# Altium PCB protoboard.PcbDoc
Units mil, origin at the board's own origin, x right, y up, seen from the top; angles counter-clockwise.
Board outline 1150 x 1150 mil, 2 copper layers (Top Layer, Bottom Layer); 9 components, 18 nets, 80 pads, 0 vias.
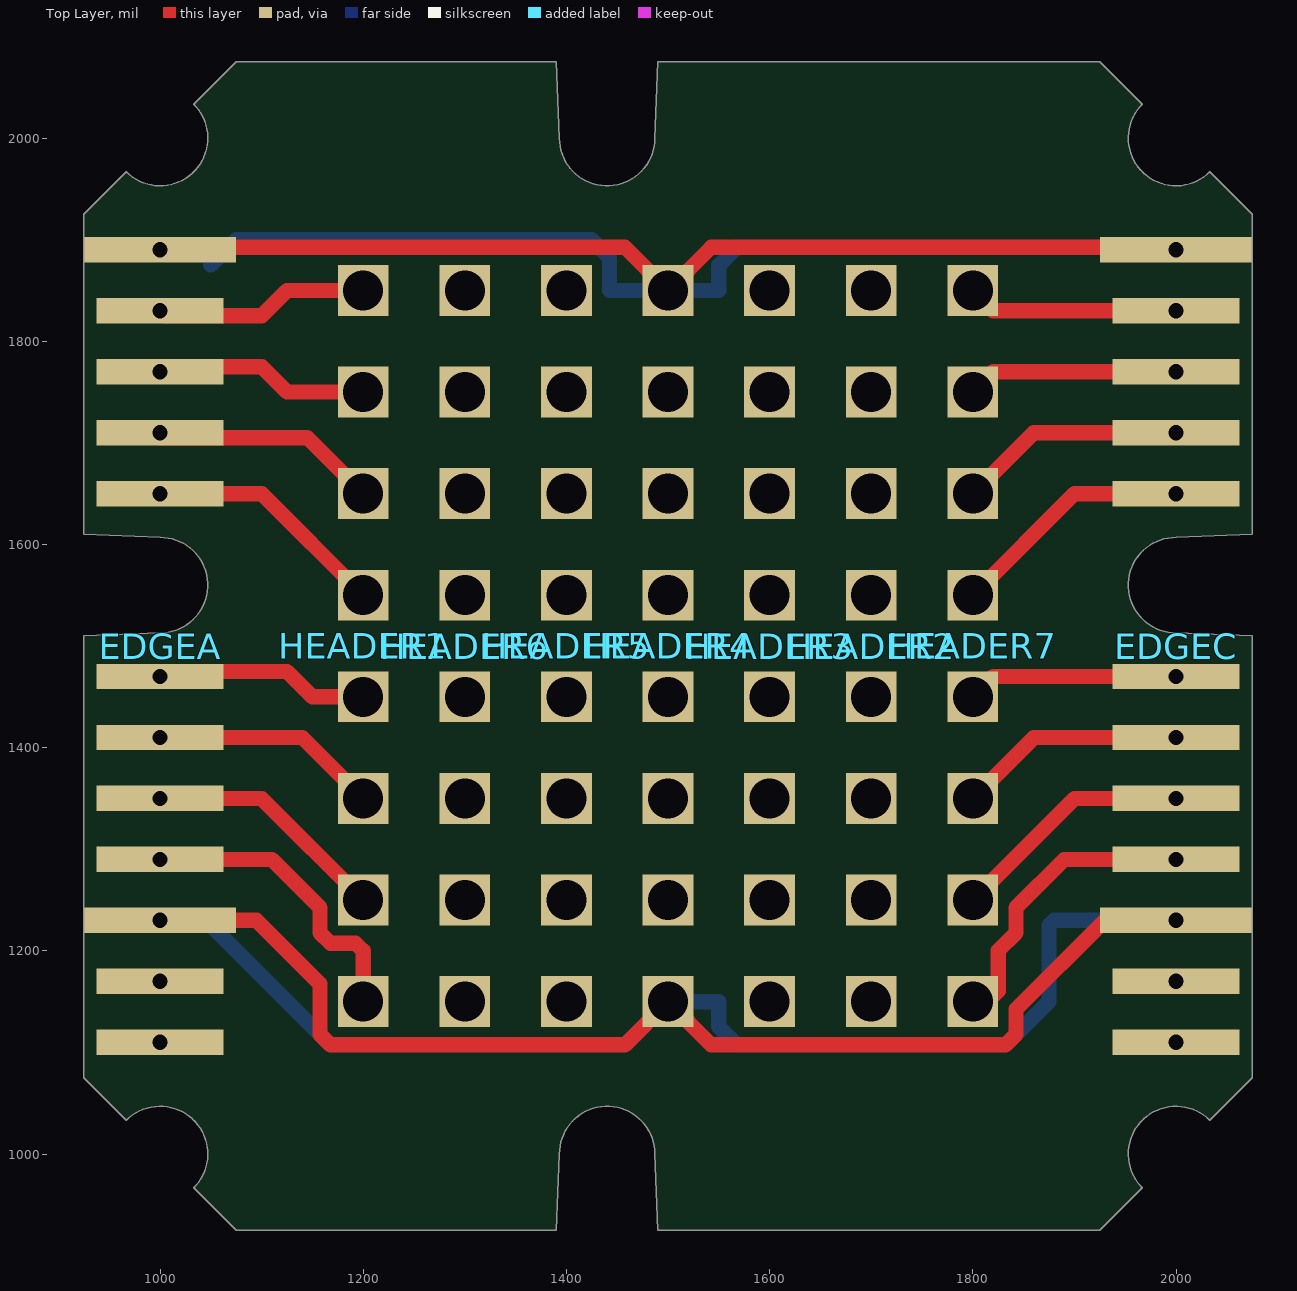
[diagram p0: Top Layer view]
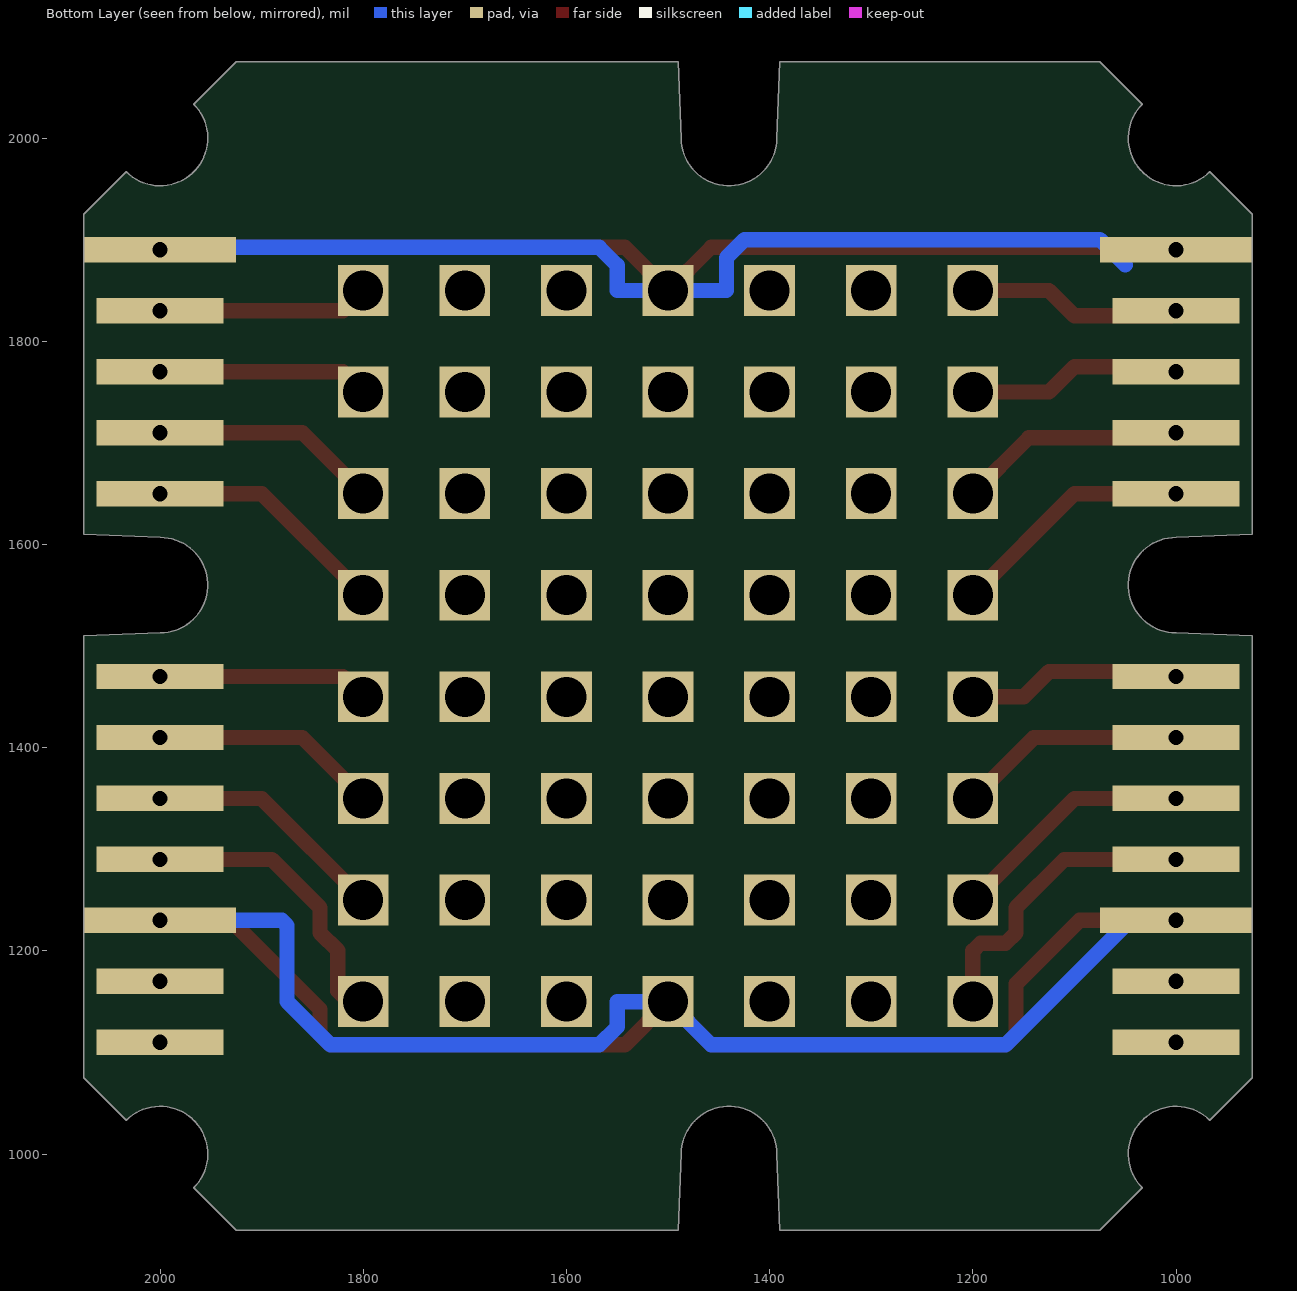
[diagram p1: Bottom Layer view, seen from below]

## Layer stack, top to bottom
Top Solder: solder mask 0.4, Solder Resist, Dk 3.5
Top Layer: signal copper 1.4
Dielectric 1: dielectric 12.6, FR-4, Dk 4.8
Bottom Layer: signal copper 1.4
Bottom Solder: solder mask 0.4, Solder Resist, Dk 3.5

## Board outline
966.77,1033.23 cw(c1000,1000) 1033.23,966.77 1075,925 1390,925 1393,1000 cw(c1440,1000) 1487,1000 1486.97,1000.68 1490,925 1925,925 1966.77,966.77 cw(c2000,1000) 2033.23,1033.23 2075,1075 2075,1510 1999.32,1513.03 2000,1513 cw(c2000,1560) 2000,1607 2075,1610 2075,1925 2033.23,1966.77 cw(c2000,2000) 1966.77,2033.23 1925,2075 1490,2075 1486.97,1999.32 1487,2000 cw(c1440,2000) 1393,2000 1390,2075 1075,2075 1033.23,2033.23 cw(c1000,2000) 966.77,1966.77 925,1925 925,1610 1000,1607 cw(c1000,1560) 1000,1513 1000.68,1513.03 925,1510 925,1075

## Design rules (kind name [scope] priority, off if disabled: settings)
Clearance [All] p1: gap=10
PolygonConnect [All] p1: connectstyle=Relief reliefconductorwidth=10 reliefentries=4 polygonreliefangle="90 Angle" airgapwidth=10
RoutingVias [All] p1: holewidth=28 width=50 viastyle="Through Hole" minholewidth=28 minwidth=50 maxholewidth=28 maxwidth=50
SolderMaskExpansion [All] p1: expansion=4
UnpouredPolygon [All] p1: allowunpoured=FALSE
Width [All] p1: maxlimit=15 minlimit=10 preferedwidth=10
29 further rules are at their usual default settings.

## Components (designator, comment, footprint, x,y, rotation, side; value= is the part's Value field where it differs from the comment)
EDGEA "Generic Modular8 edge" "MODULAR8 VERTICAL PINS" 1000,985 r0 top
EDGEC "Generic Modular8 edge" "MODULAR8 VERTICAL PINS" 2000,985 r0 top
HEADER1 "8x1" "8x1 THRU HOLES 0.1\" PITCH" 1200,1500 r180 top
HEADER2 "8x1" "8x1 THRU HOLES 0.1\" PITCH" 1700,1500 r0 top
HEADER3 "8x1" "8x1 THRU HOLES 0.1\" PITCH" 1600,1500 r0 top
HEADER4 "8x1" "8x1 THRU HOLES 0.1\" PITCH" 1500,1500 r180 top
HEADER5 "8x1" "8x1 THRU HOLES 0.1\" PITCH" 1400,1500 r0 top
HEADER6 "8x1" "8x1 THRU HOLES 0.1\" PITCH" 1300,1500 r0 top
HEADER7 "8x1" "8x1 THRU HOLES 0.1\" PITCH" 1800,1500 r180 top

## Footprints (in the part's own frame and the unit in brackets; to place one, negate y for a bottom-side part, rotate by r counter-clockwise, add the part's x,y. Pads: shape width x height; smd on the part's side, far side on the other; paste and mask are expansions set on the pad)
"8x1 THRU HOLES 0.1\" PITCH" [mm]
  rect 1.27x1.27 hole 1 unplated: 1(0,8.89) 2(0,6.35) 3(0,3.81) 4(0,1.27) 5(0,-1.27) 6(0,-3.81) 7(0,-6.35) 8(0,-8.89)
"MODULAR8 VERTICAL PINS" [mil]
  rect 150x25 hole 15 unplated: 1(0,905) 10(0,245)
  rect 125x25 hole 15 unplated: 2(0,845) 3(0,785) 4(0,725) 5(0,665) 6(0,485) 7(0,425) 8(0,365) 9(0,305) 11(0,185) 12(0,125)

## Nets (pads, with @x,y where several pads share a name; then routed paths per layer and width w, separated by ;. In a path a pad name is that pad's centre, name@x,y a point inside that pad or via, vN(x,y) a via of type N, cw(c..) or ccw(c..) an arc to the next point about the centre after c; other vN are vias at no path point)
NetEDGEA_1: EDGEA.1 EDGEC.1 HEADER4.8 | length 2074.8
  Top Layer w15: EDGEA.1 1000,1892.5 1457.5,1892.5 HEADER4.8 1542.5,1892.5 2000,1892.5 EDGEC.1
  Bottom Layer w15: 1050,1875 1075,1900 1424.75,1900 1442.5,1882.25 1442.5,1850 HEADER4.8 1550,1850 1550,1874.75 1567.75,1892.5 2000,1892.5 EDGEC.1
NetEDGEA_2: EDGEA.2 HEADER1.8 | length 212.4
  Top Layer w15: EDGEA.2 1005,1825 1100,1825 1125,1850 HEADER1.8
NetEDGEA_3: EDGEA.3 HEADER1.7 | length 212.4
  Top Layer w15: EDGEA.3 1005,1775 1100,1775 1125,1750 HEADER1.7
NetEDGEA_4: EDGEA.4 HEADER1.6 | length 227.8
  Top Layer w15: EDGEA.4 1000,1705 1145,1705 HEADER1.6
NetEDGEA_5: EDGEA.5 HEADER1.5 | length 241.4
  Top Layer w15: EDGEA.5 1100,1650 HEADER1.5
NetEDGEA_6: EDGEA.6 HEADER1.4 | length 212.4
  Top Layer w15: EDGEA.6 1005,1475 1125,1475 1150,1450 HEADER1.4
NetEDGEA_7: EDGEA.7 HEADER1.3 | length 224.9
  Top Layer w15: EDGEA.7 1140,1410 HEADER1.3
NetEDGEA_8: EDGEA.8 HEADER1.2 | length 241.4
  Top Layer w15: EDGEA.8 1100,1350 HEADER1.2
NetEDGEA_9: EDGEA.9 HEADER1.1 | length 301.8
  Top Layer w15: EDGEA.9 1110,1290 1157.5,1242.5 1157.5,1217.75 1167.75,1207.5 1192.5,1207.5 1200,1200 HEADER1.1
NetEDGEA_10: EDGEA.10 EDGEC.10 HEADER4.1 | length 2375.3
  Top Layer w15: EDGEA.10 1095,1230 1157.5,1167.5 1157.5,1117.75 1167.75,1107.5 1457.5,1107.5 HEADER4.1 1542.5,1107.5 1832.25,1107.5 1842.5,1117.75 1842.5,1142.5 1930,1230 EDGEC.10
  Bottom Layer w15: EDGEA.10 1045.25,1230 1167.75,1107.5 1457.5,1107.5 HEADER4.1 1550,1150 1550,1125.25 1567.75,1107.5 1832.25,1107.5 1875,1150.25 1875,1225 1880,1230 EDGEC.10
NetEDGEC_2: EDGEC.2 HEADER7.8 | length 208.3
  Top Layer w15: HEADER7.8 1820,1830 EDGEC.2
NetEDGEC_3: EDGEC.3 HEADER7.7 | length 208.3
  Top Layer w15: HEADER7.7 1820,1770 EDGEC.3
NetEDGEC_4: EDGEC.4 HEADER7.6 | length 224.9
  Top Layer w15: HEADER7.6 1860,1710 EDGEC.4
NetEDGEC_5: EDGEC.5 HEADER7.5 | length 241.4
  Top Layer w15: HEADER7.5 1900,1650 EDGEC.5
NetEDGEC_6: EDGEC.6 HEADER7.4 | length 208.3
  Top Layer w15: HEADER7.4 1820,1470 EDGEC.6
NetEDGEC_7: EDGEC.7 HEADER7.3 | length 224.9
  Top Layer w15: HEADER7.3 1860,1410 EDGEC.7
NetEDGEC_8: EDGEC.8 HEADER7.2 | length 241.4
  Top Layer w15: HEADER7.2 1900,1350 EDGEC.8
NetEDGEC_9: EDGEC.9 HEADER7.1 | length 295.9
  Top Layer w15: HEADER7.1 1814.64,1150 1825,1160.36 1825,1200.25 1842.5,1217.75 1842.5,1242.5 1890,1290 EDGEC.9
pads on no net: EDGEA.11 EDGEA.12 EDGEC.11 EDGEC.12 HEADER2.1 HEADER2.2 HEADER2.3 HEADER2.4 HEADER2.5 HEADER2.6 HEADER2.7 HEADER2.8 HEADER3.1 HEADER3.2 HEADER3.3 HEADER3.4 HEADER3.5 HEADER3.6 HEADER3.7 HEADER3.8 HEADER4.2 HEADER4.3 HEADER4.4 HEADER4.5 HEADER4.6 HEADER4.7 HEADER5.1 HEADER5.2 HEADER5.3 HEADER5.4 HEADER5.5 HEADER5.6 HEADER5.7 HEADER5.8 HEADER6.1 HEADER6.2 HEADER6.3 HEADER6.4 HEADER6.5 HEADER6.6 HEADER6.7 HEADER6.8

## Silkscreen, mask and mechanical layers (free items; w line width, h text height)
Top Solder:
  rectangle: 925,925 1075,1925
  rectangle: 1925,925 2075,1925
  rectangle: 925,925 1925,1075
  rectangle: 925,1925 2075,2075
Bottom Solder:
  rectangle: 925,925 2075,1075
  rectangle: 1925,1075 2075,2075
  rectangle: 925,1925 1925,2075
  rectangle: 925,1075 1075,1925
Mechanical 1:
  lines w5: 1000,1513 ccw(c1000,1560) 1000,1607 925,1610 925,1925 966.77,1966.77 ccw(c1000,2000) 1033.23,2033.23 1075,2075 1390,2075 1393,2000 ccw(c1440,2000) 1487,2000 ; 1000.68,1513.03 925,1510 925,1075 966.77,1033.23 cw(c1000,1000) 1033.23,966.77 1075,925 1390,925 1393,1000 cw(c1440,1000) 1487,1000 ; 1486.97,1000.68 1490,925 1925,925 1966.77,966.77 cw(c2000,1000) 2033.23,1033.23 2075,1075 2075,1510 1999.32,1513.03 ; 1486.97,1999.32 1490,2075 1925,2075 1966.77,2033.23 ccw(c2000,2000) 2033.23,1966.77 2075,1925 2075,1610 2000,1607 ccw(c2000,1560) 2000,1513